# EAGLE board Simple_BRD (EAGLE 9.6.2)
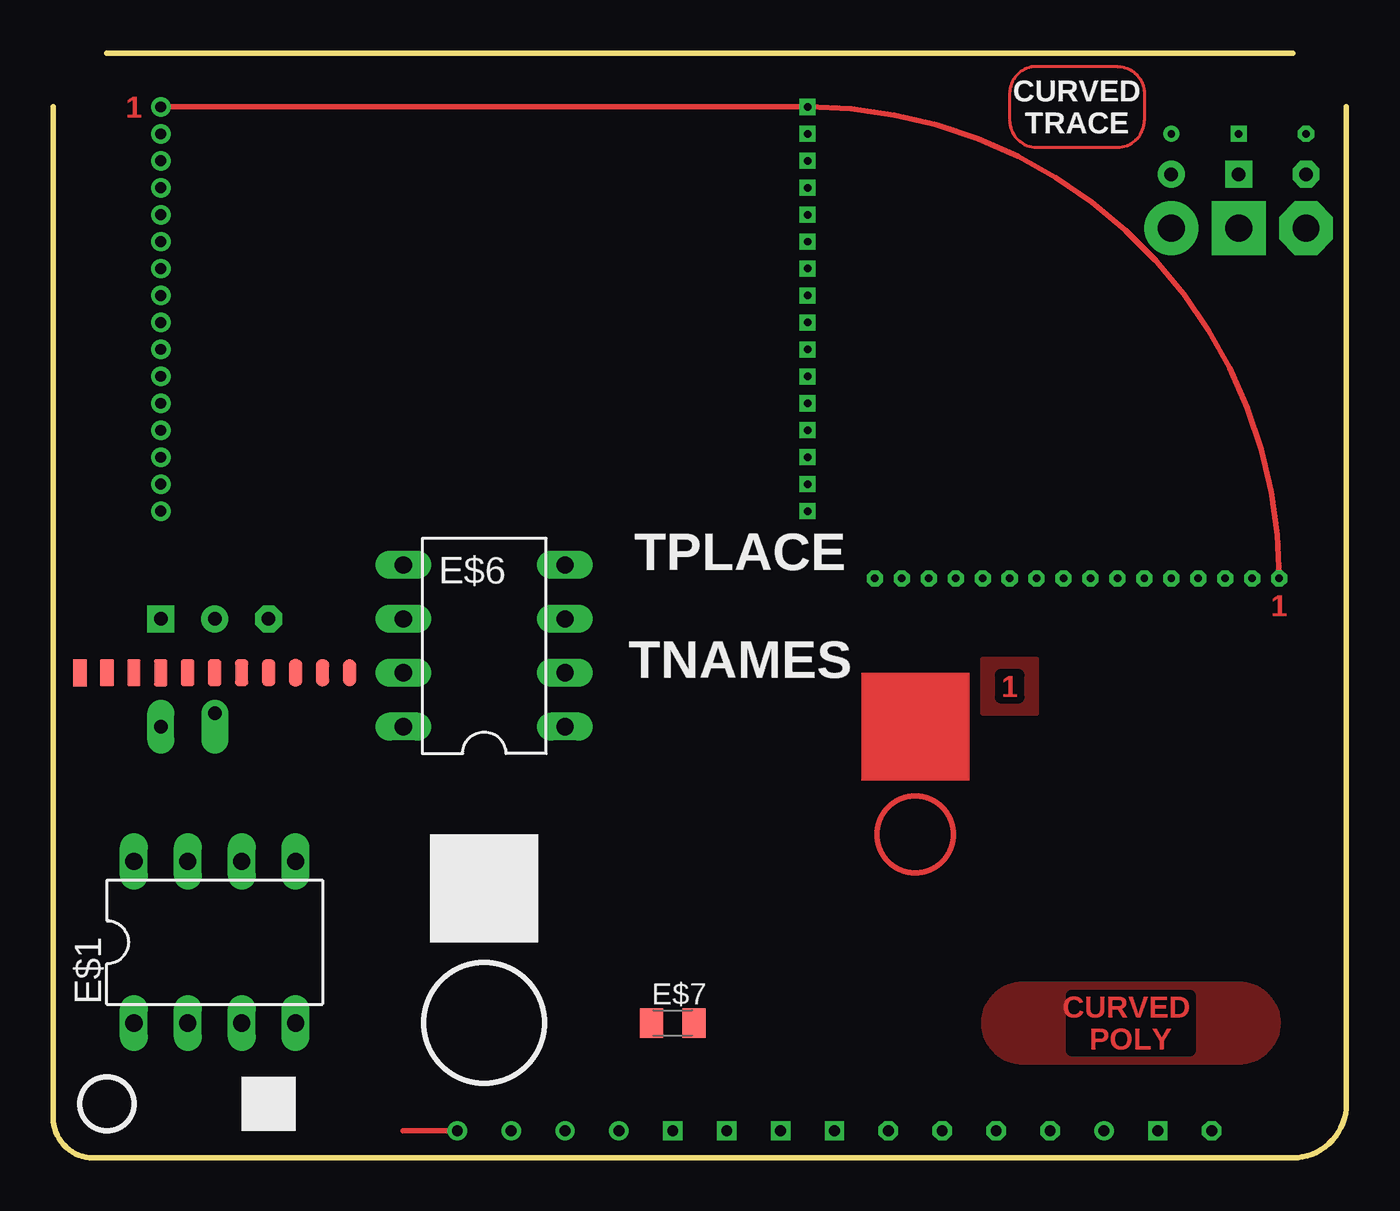
[diagram p0: board, top side]
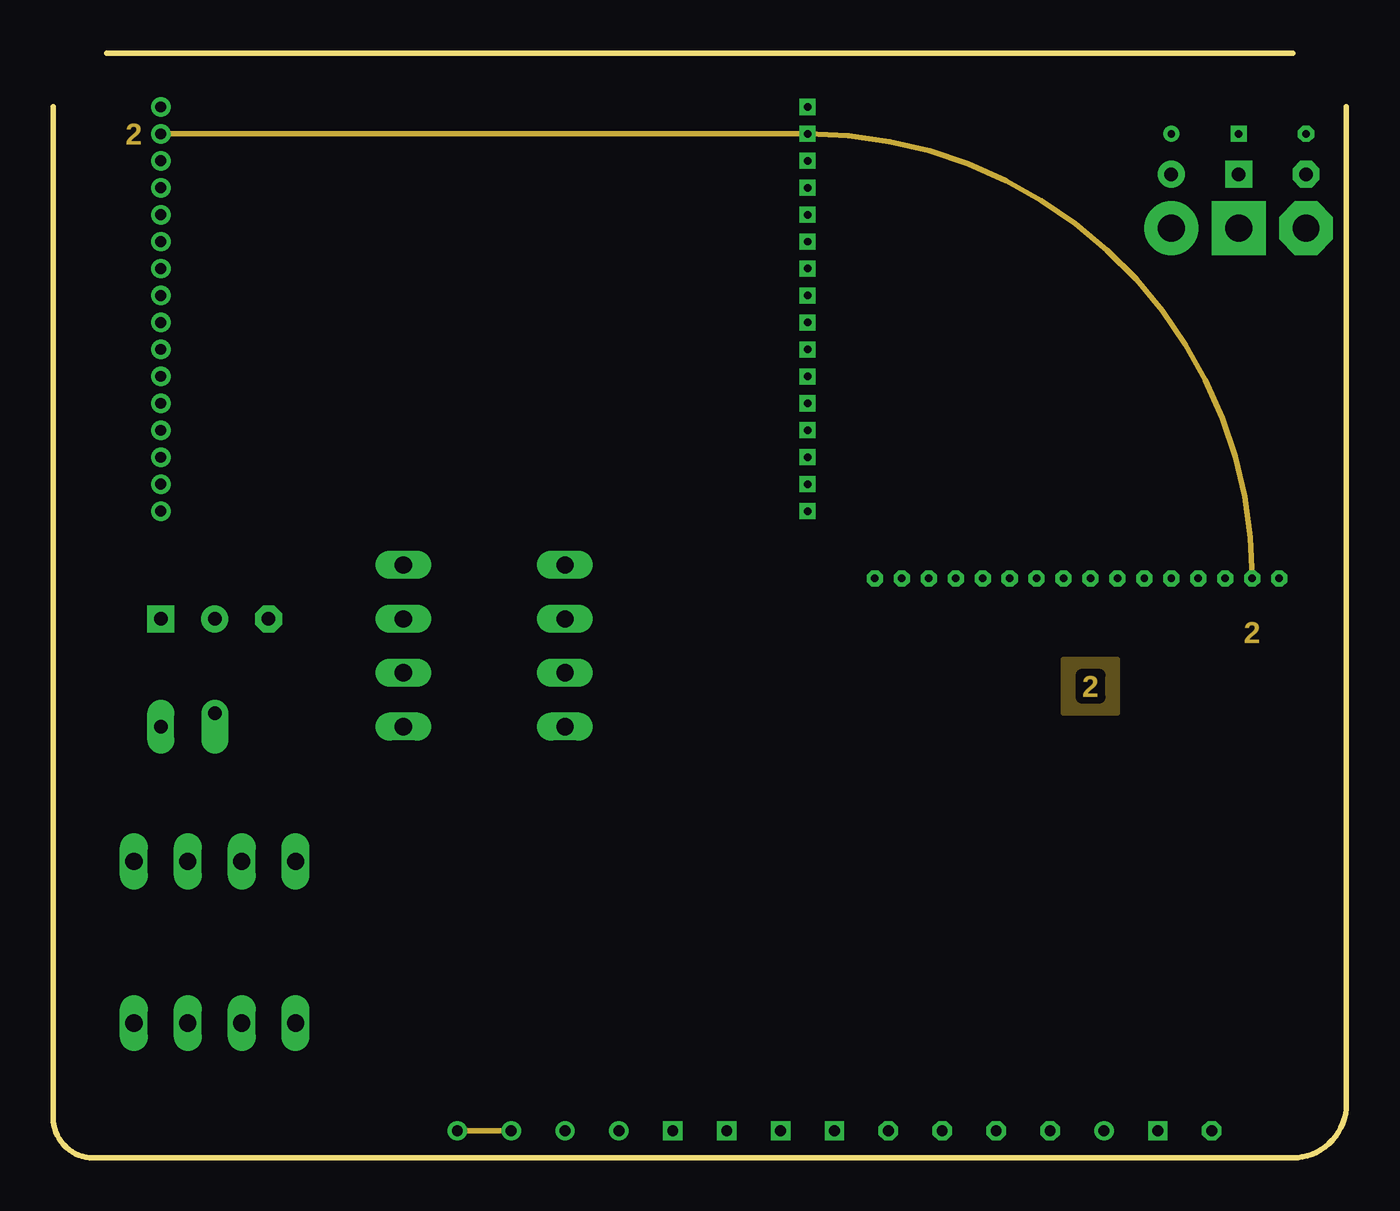
[diagram p1: board, inner layer Route2]
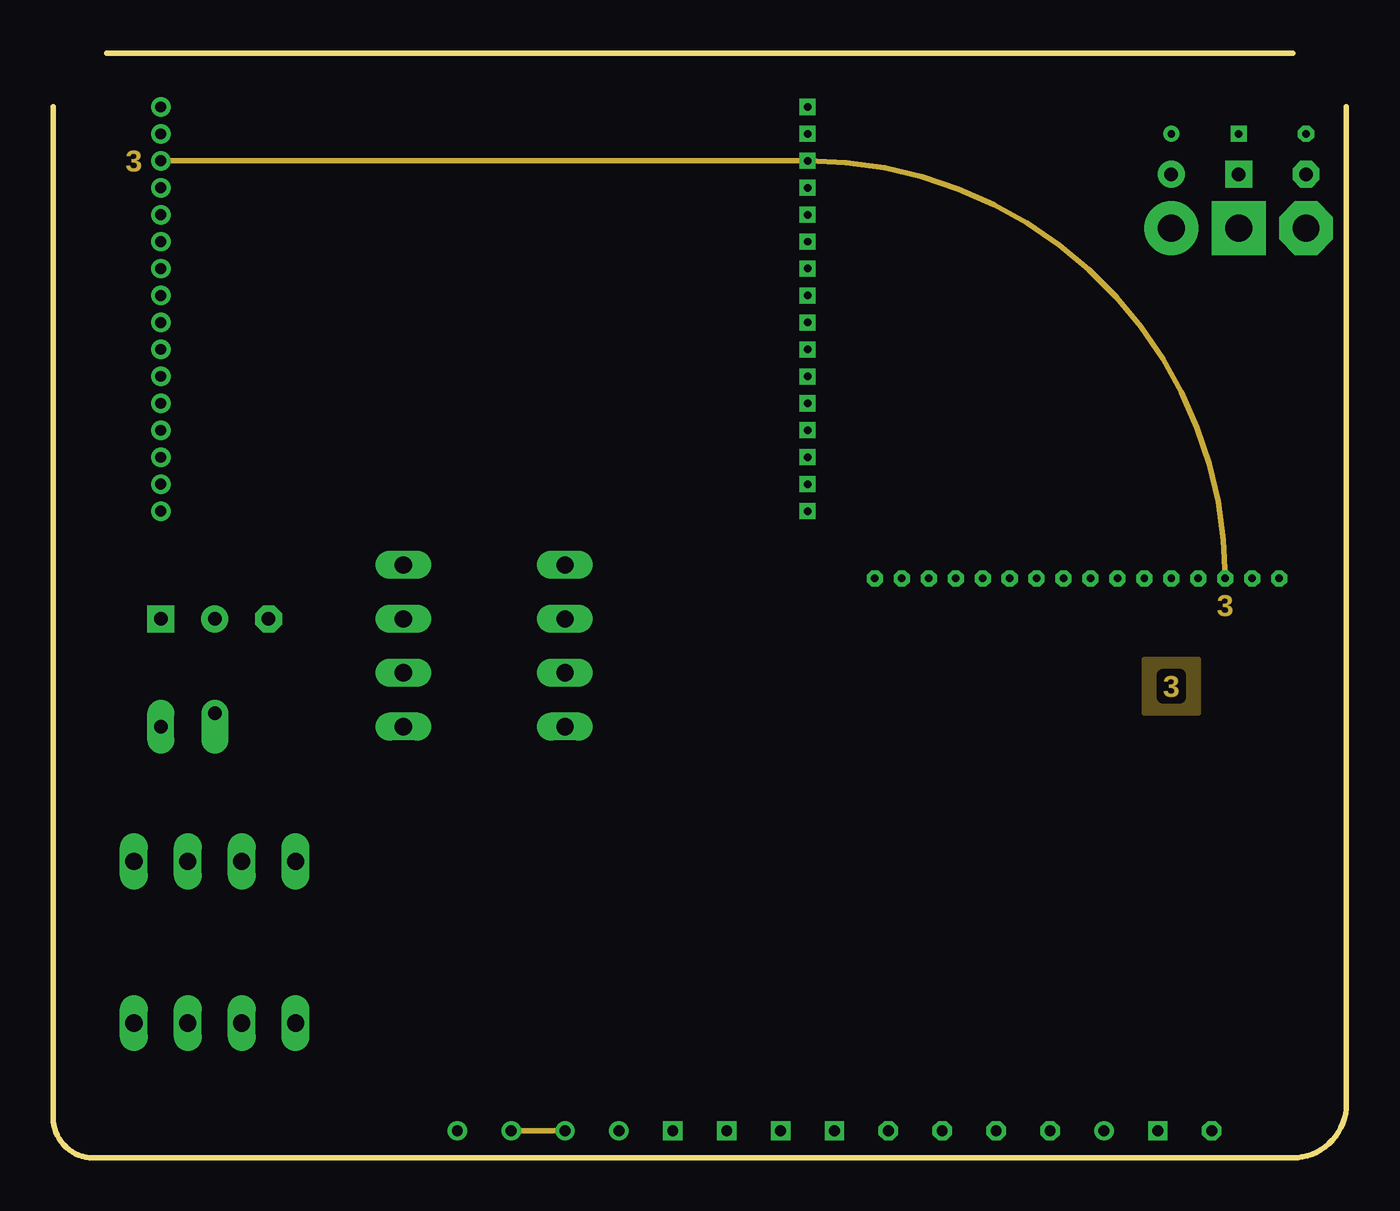
[diagram p2: board, inner layer Route3]
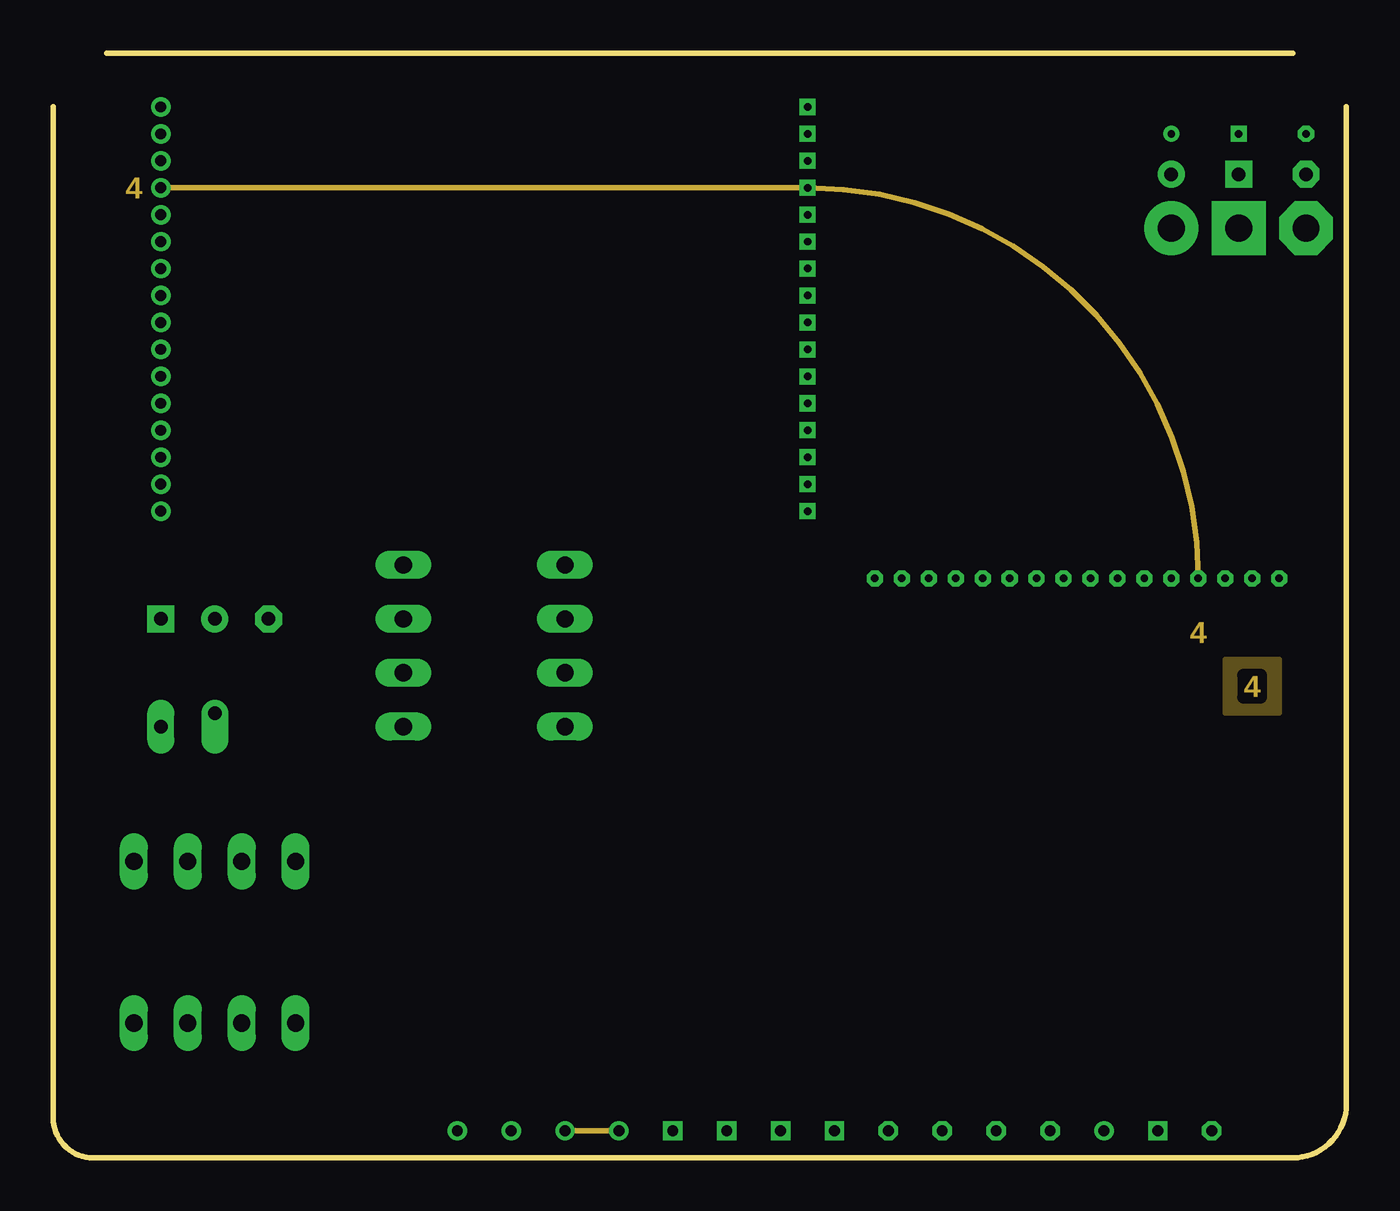
[diagram p3: board, inner layer Route4]
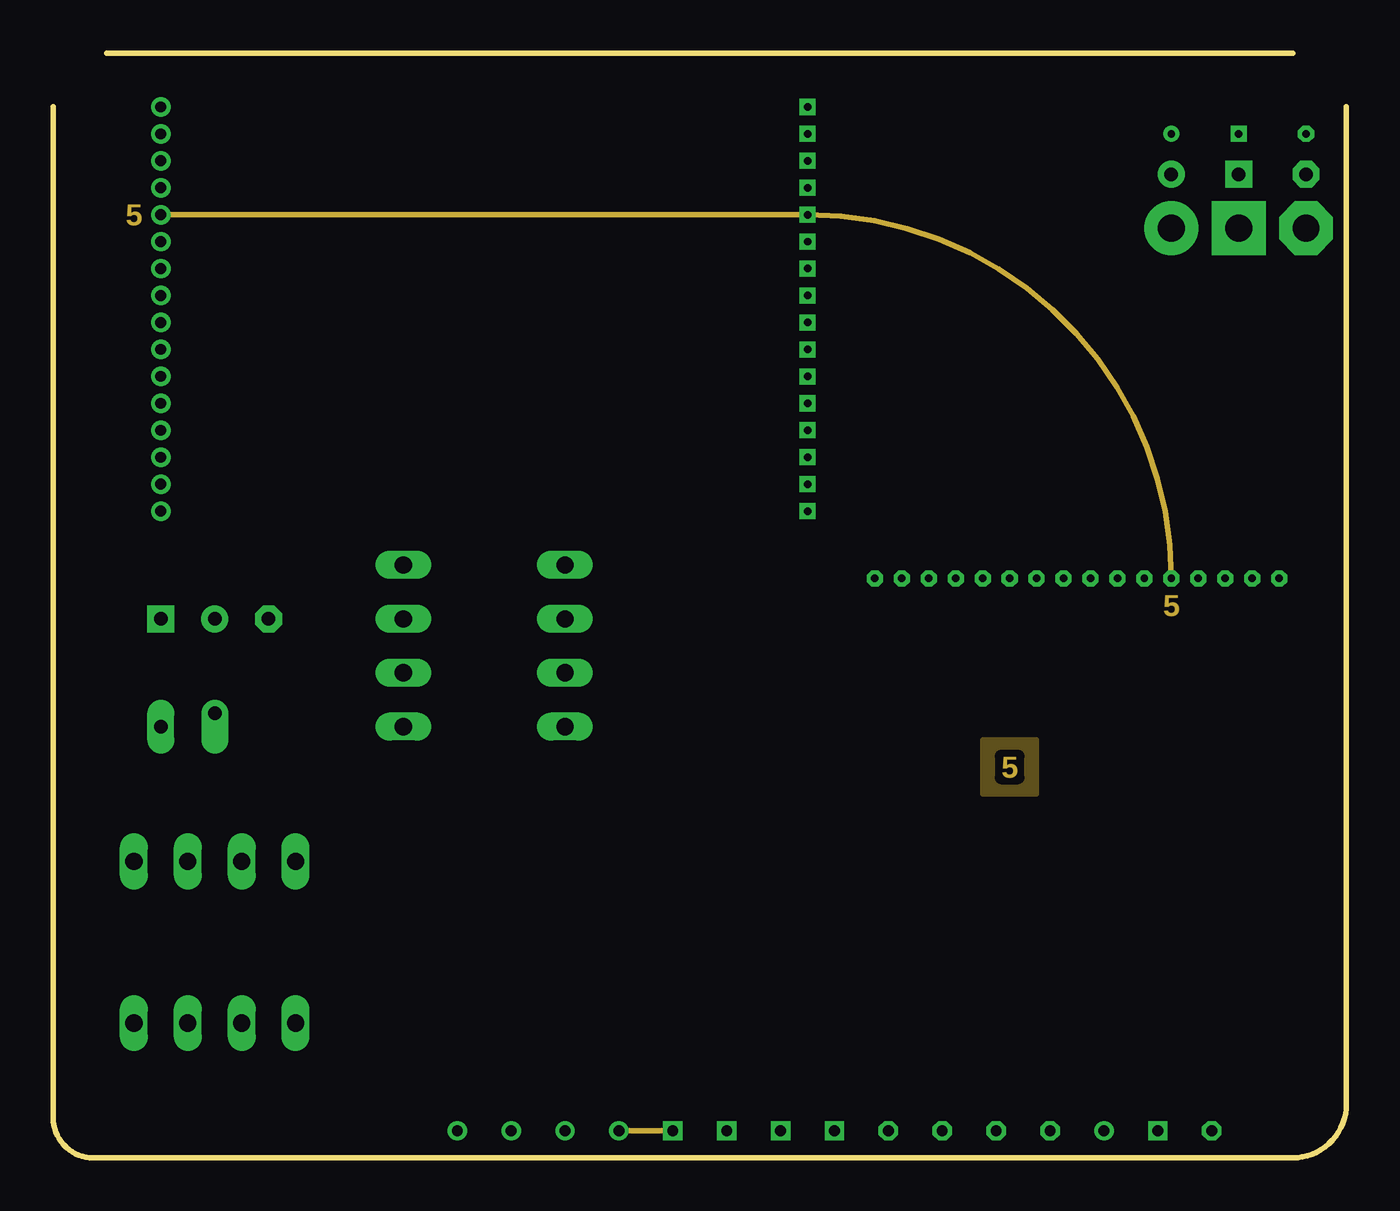
[diagram p4: board, inner layer Route5]
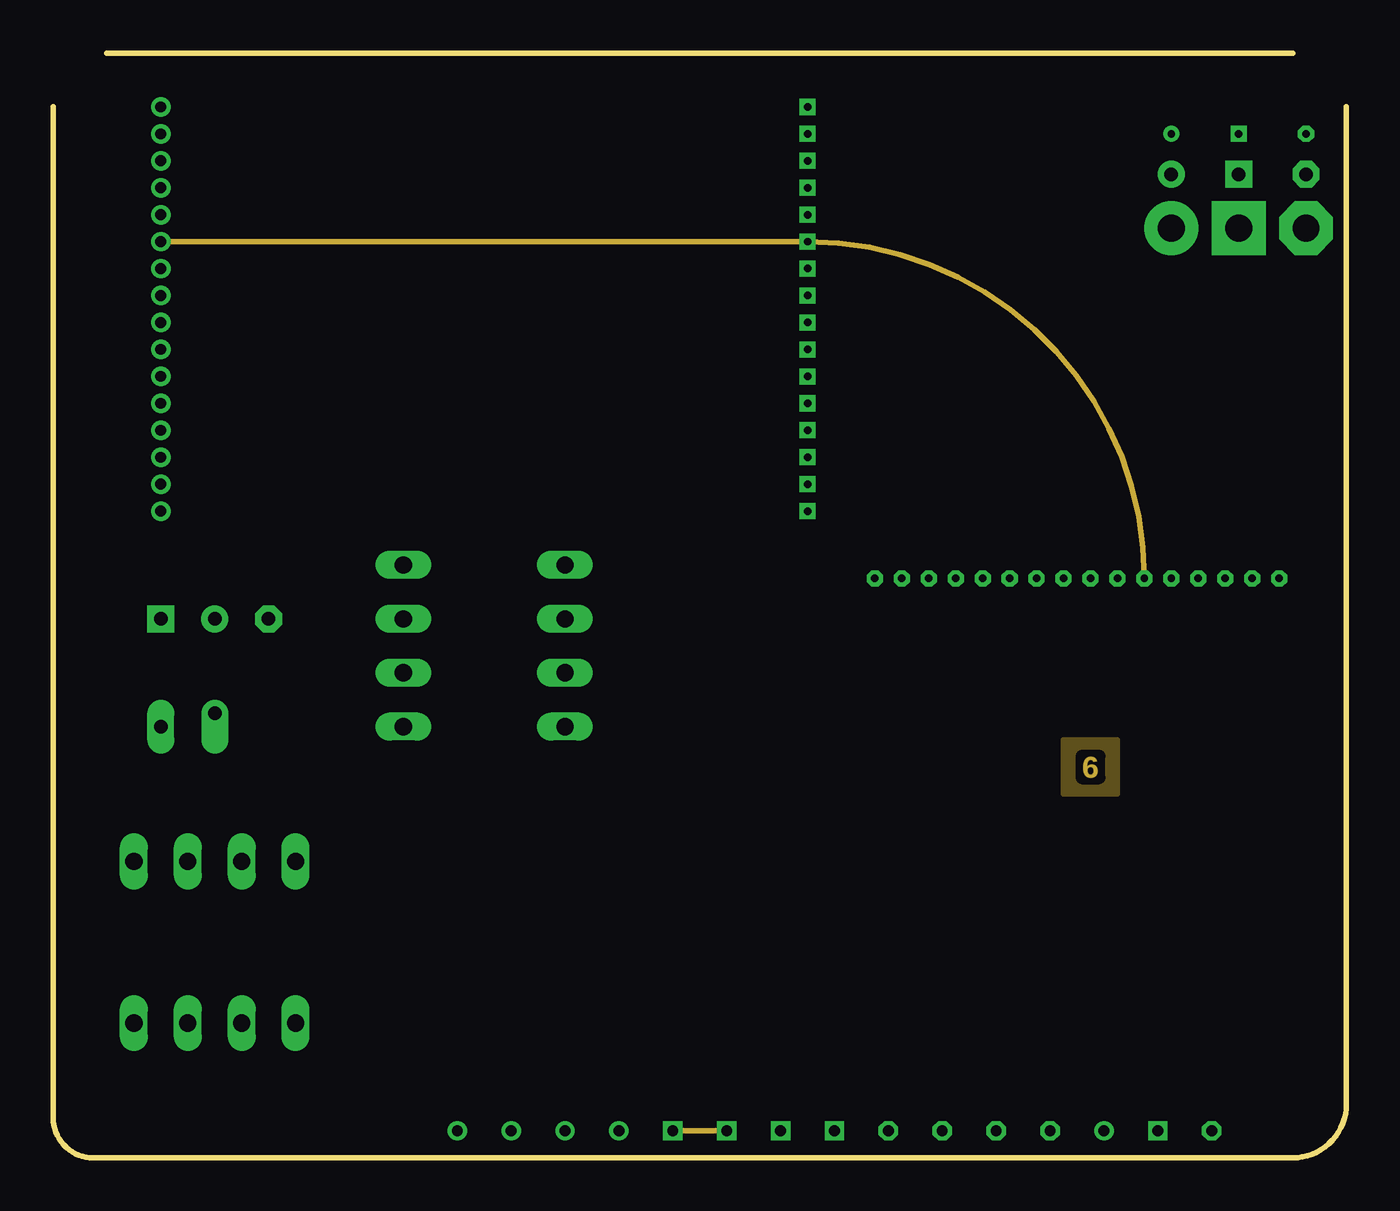
[diagram p5: board, inner layer Route6]
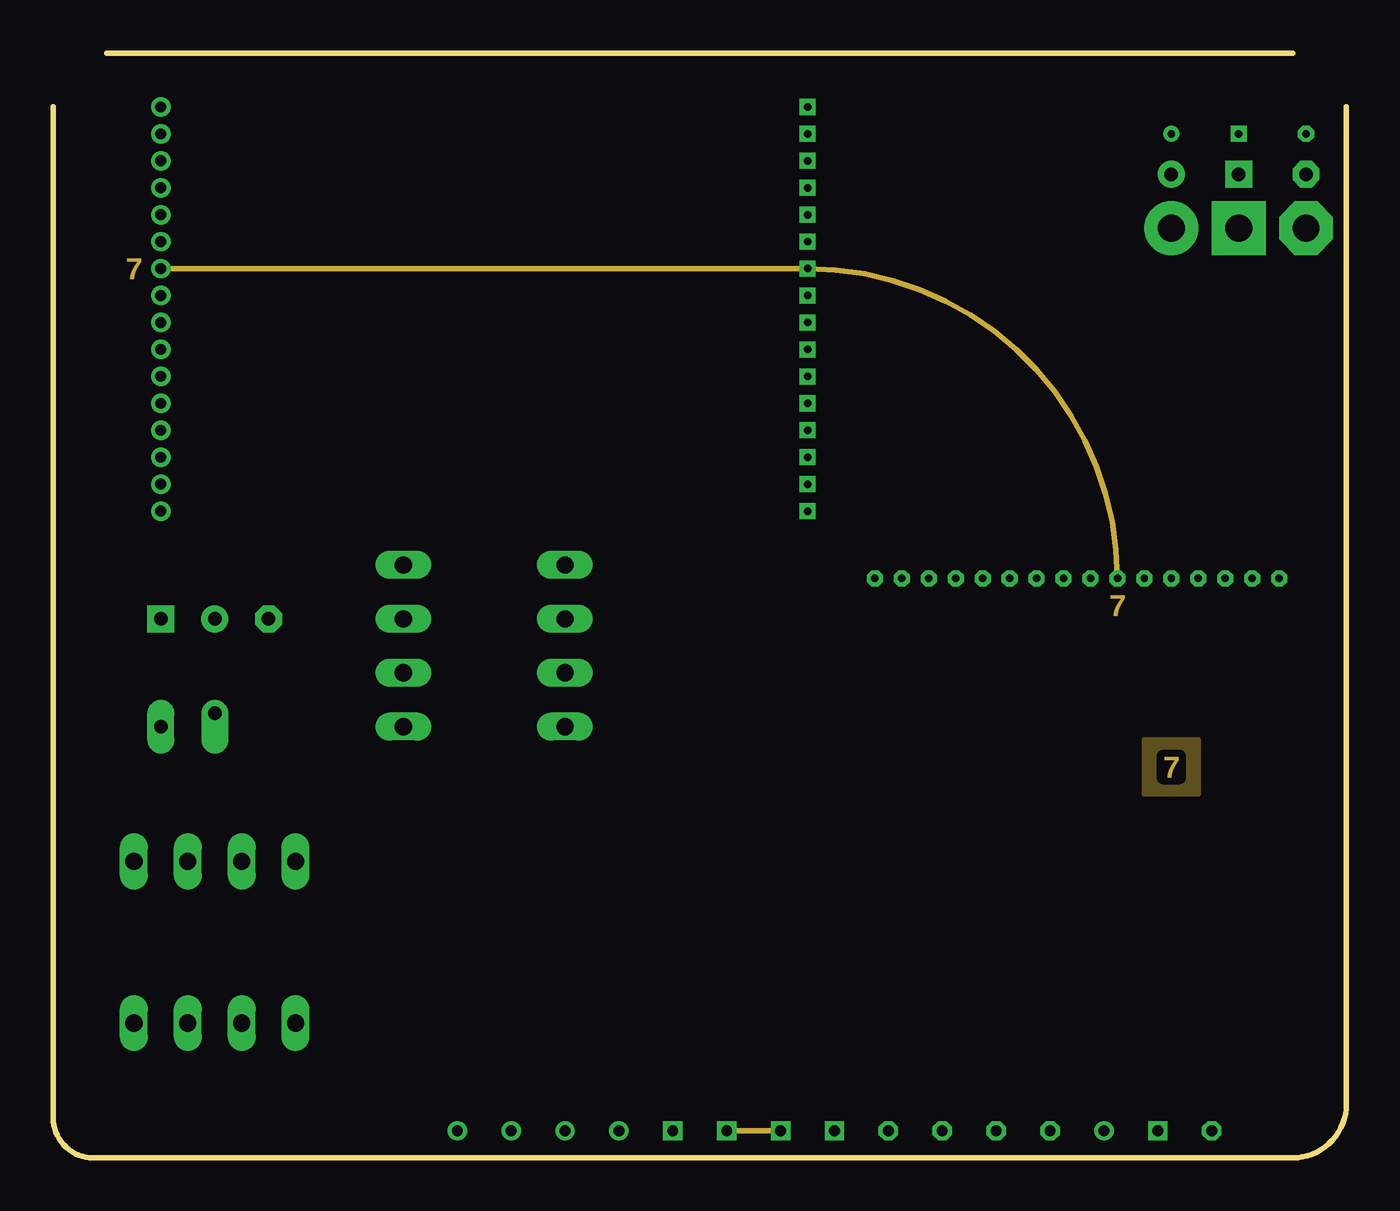
[diagram p6: board, inner layer Route7]
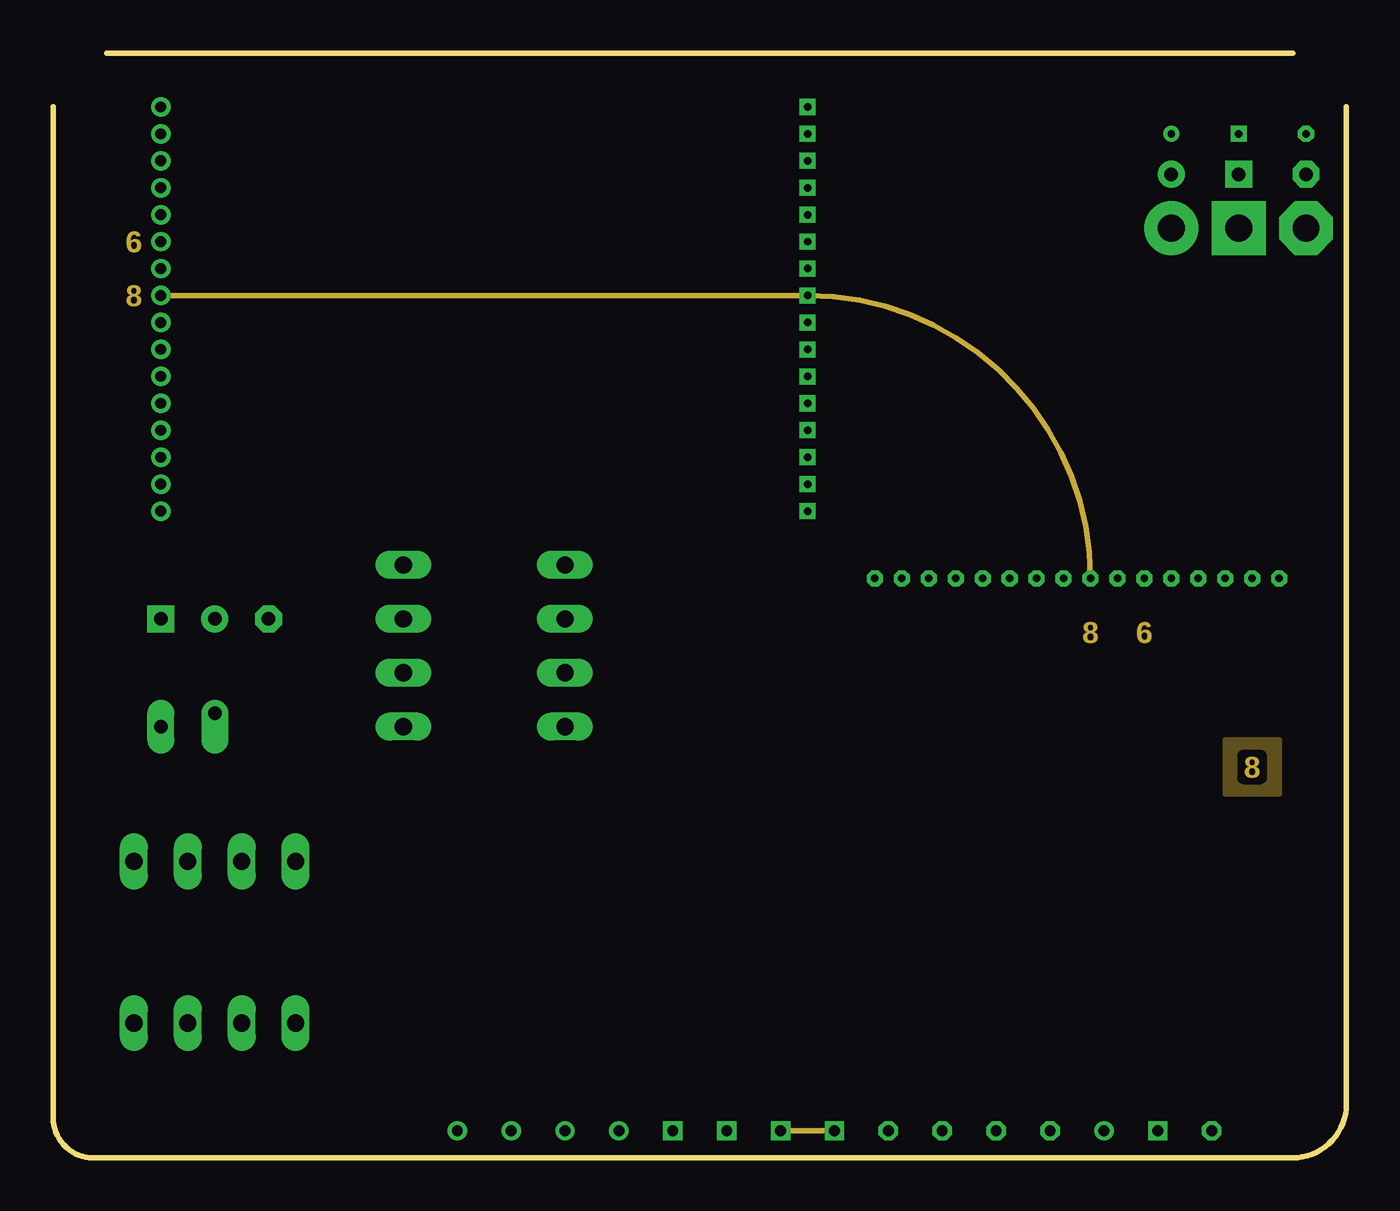
[diagram p7: board, inner layer Route8]
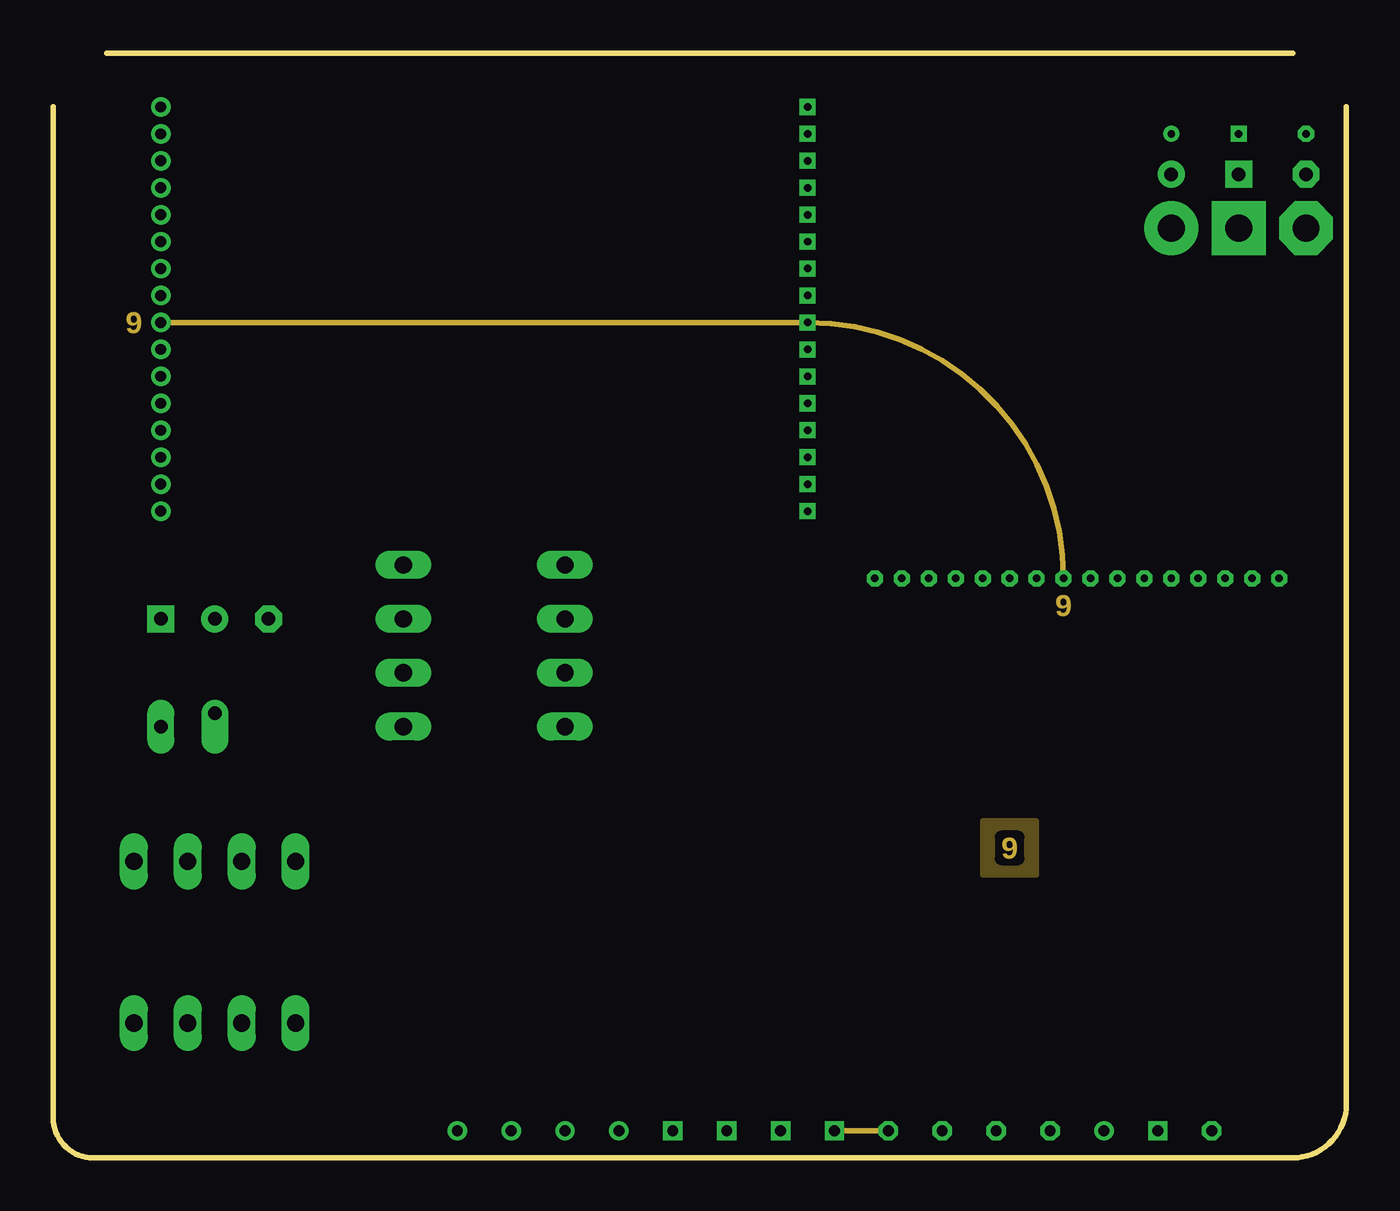
[diagram p8: board, inner layer Route9]
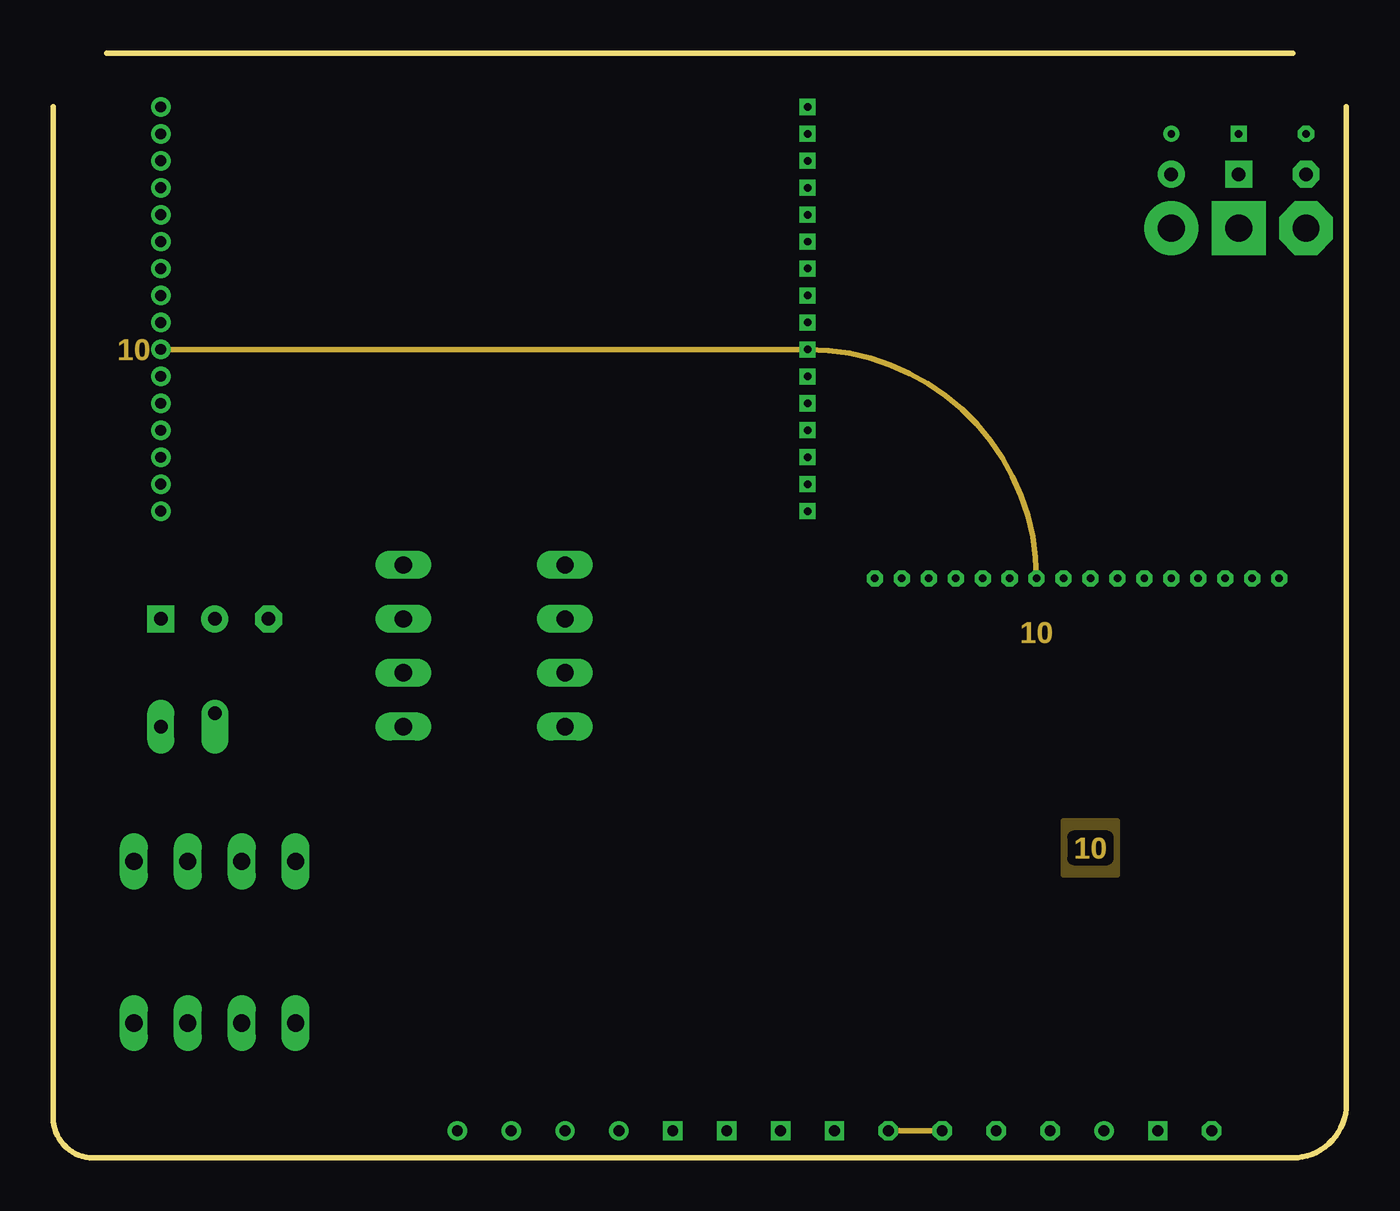
[diagram p9: board, inner layer Route10]
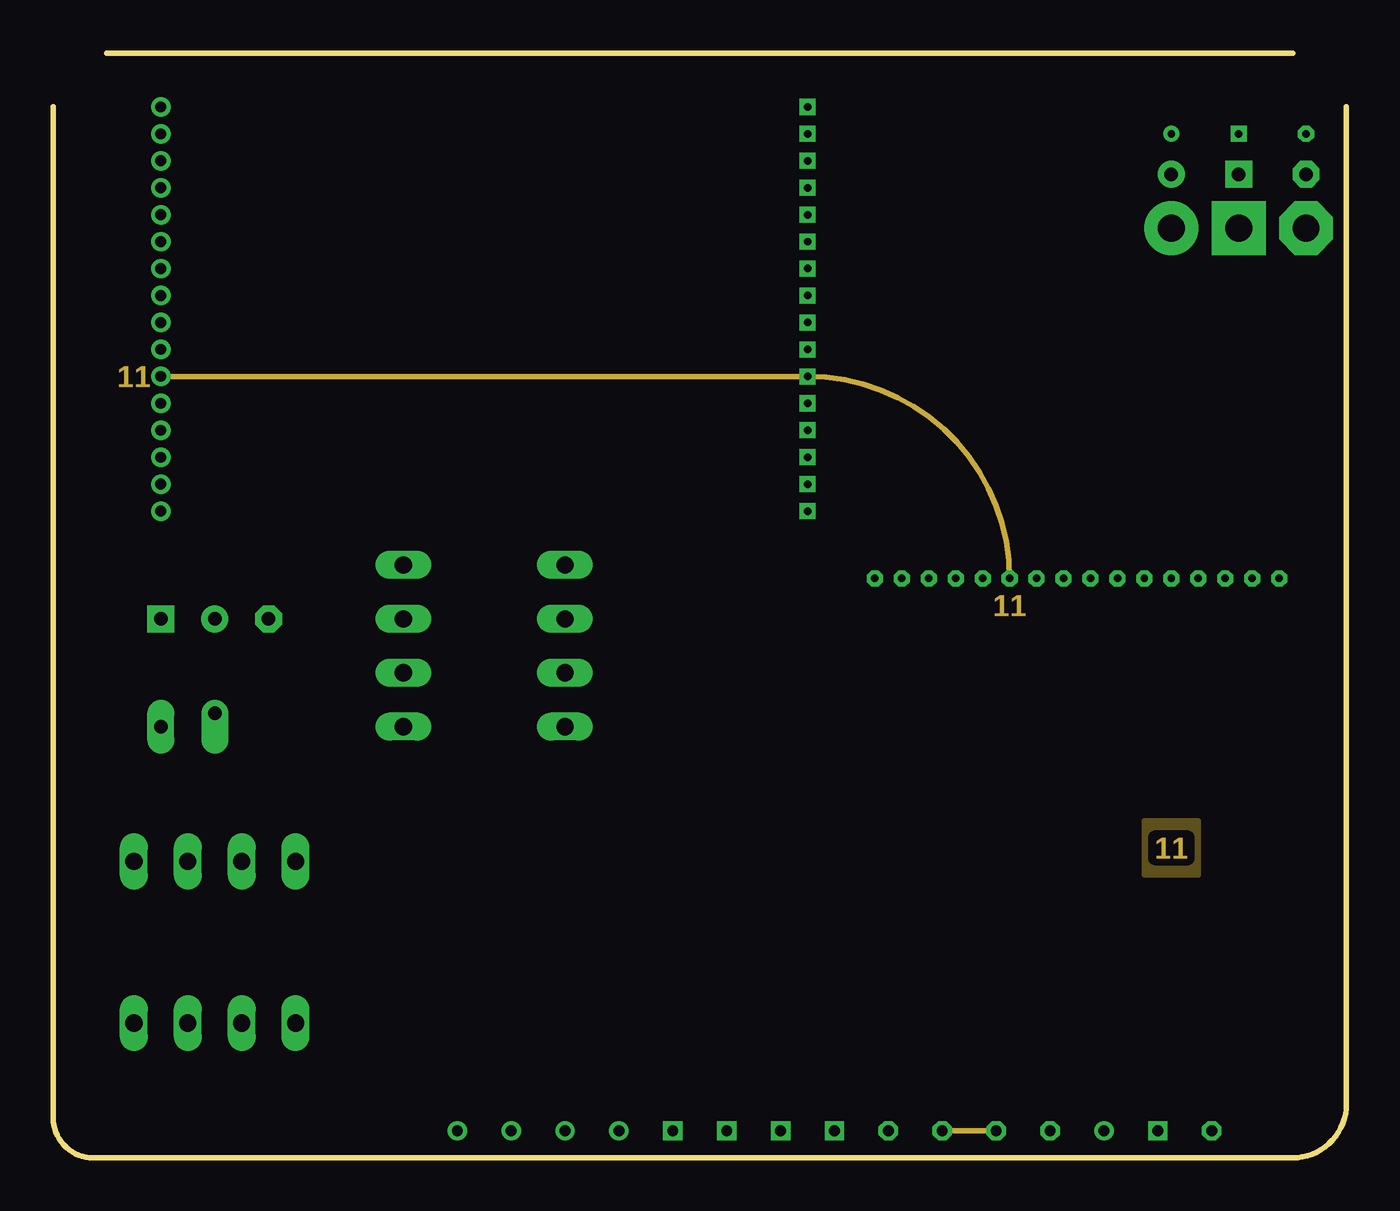
[diagram p10: board, inner layer Route11]
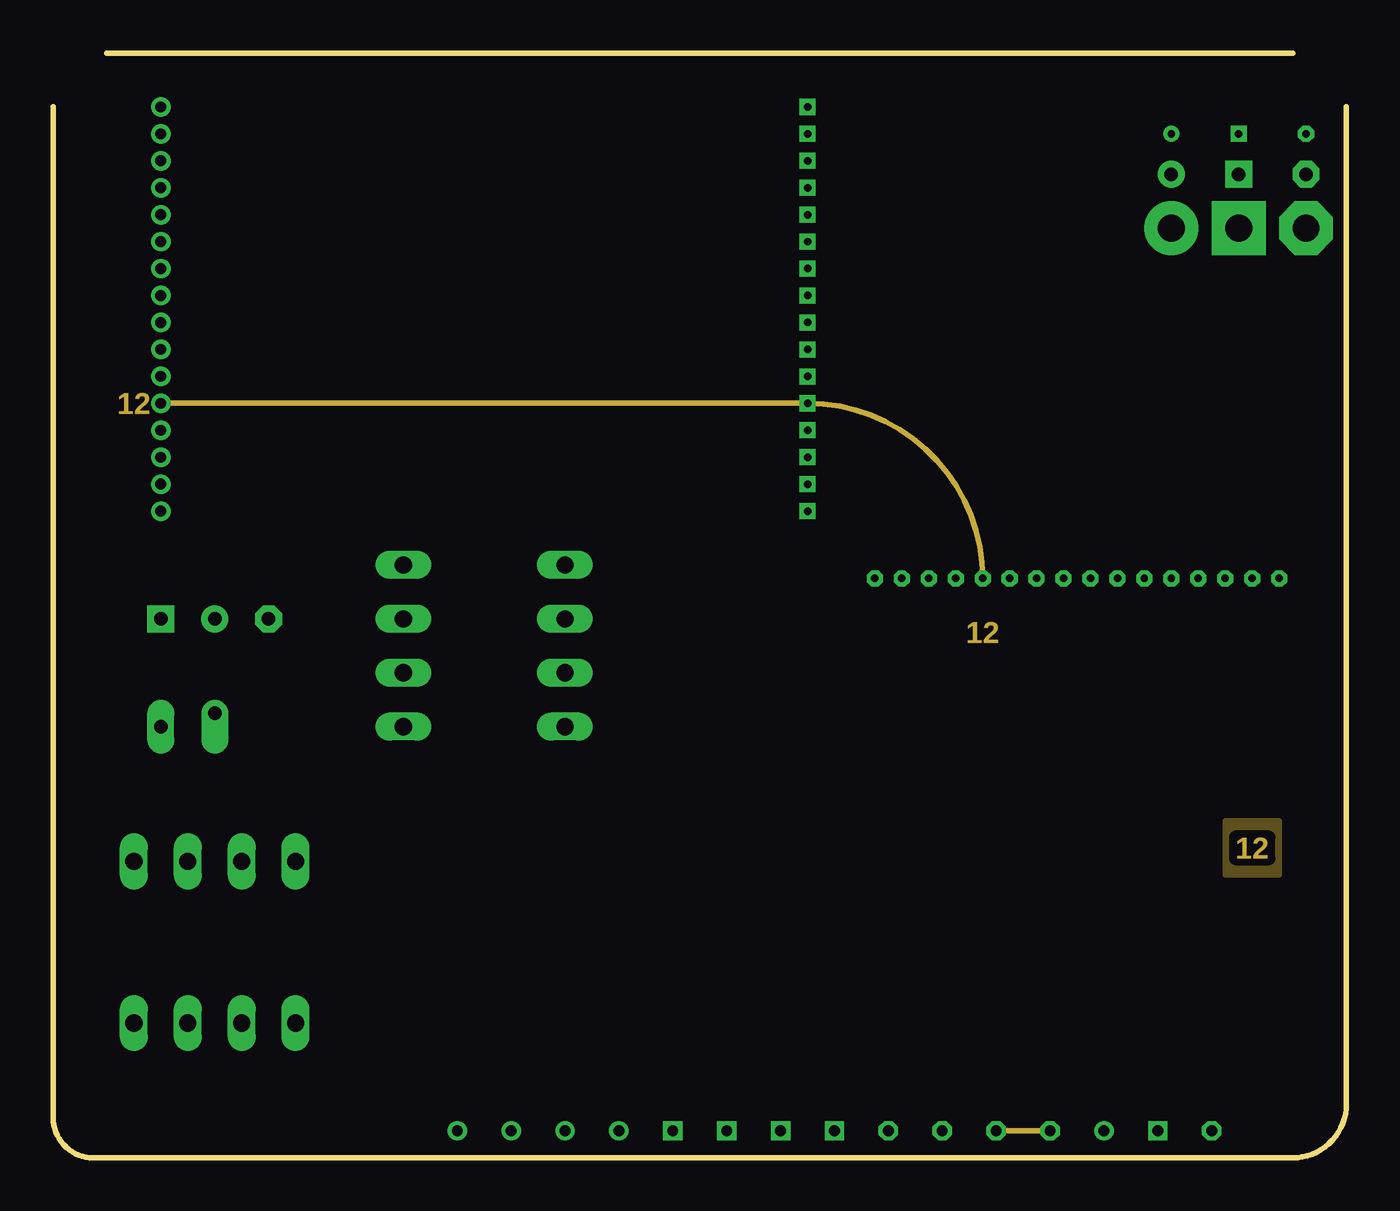
[diagram p11: board, inner layer Route12]
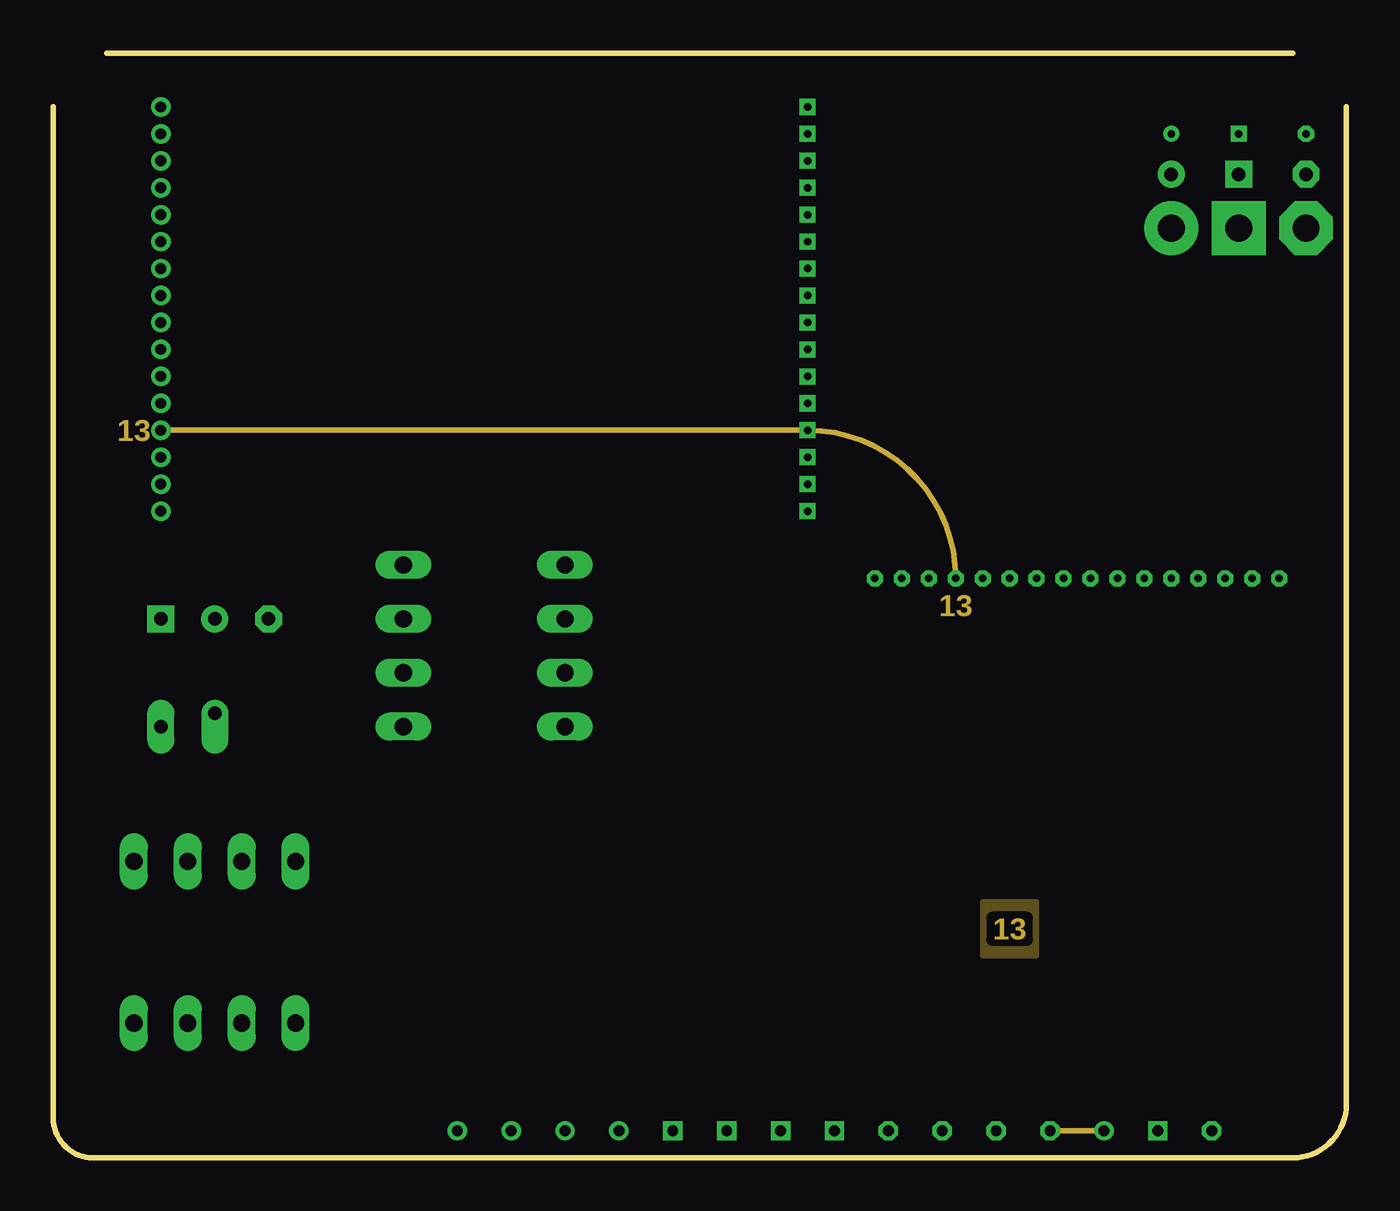
[diagram p12: board, inner layer Route13]
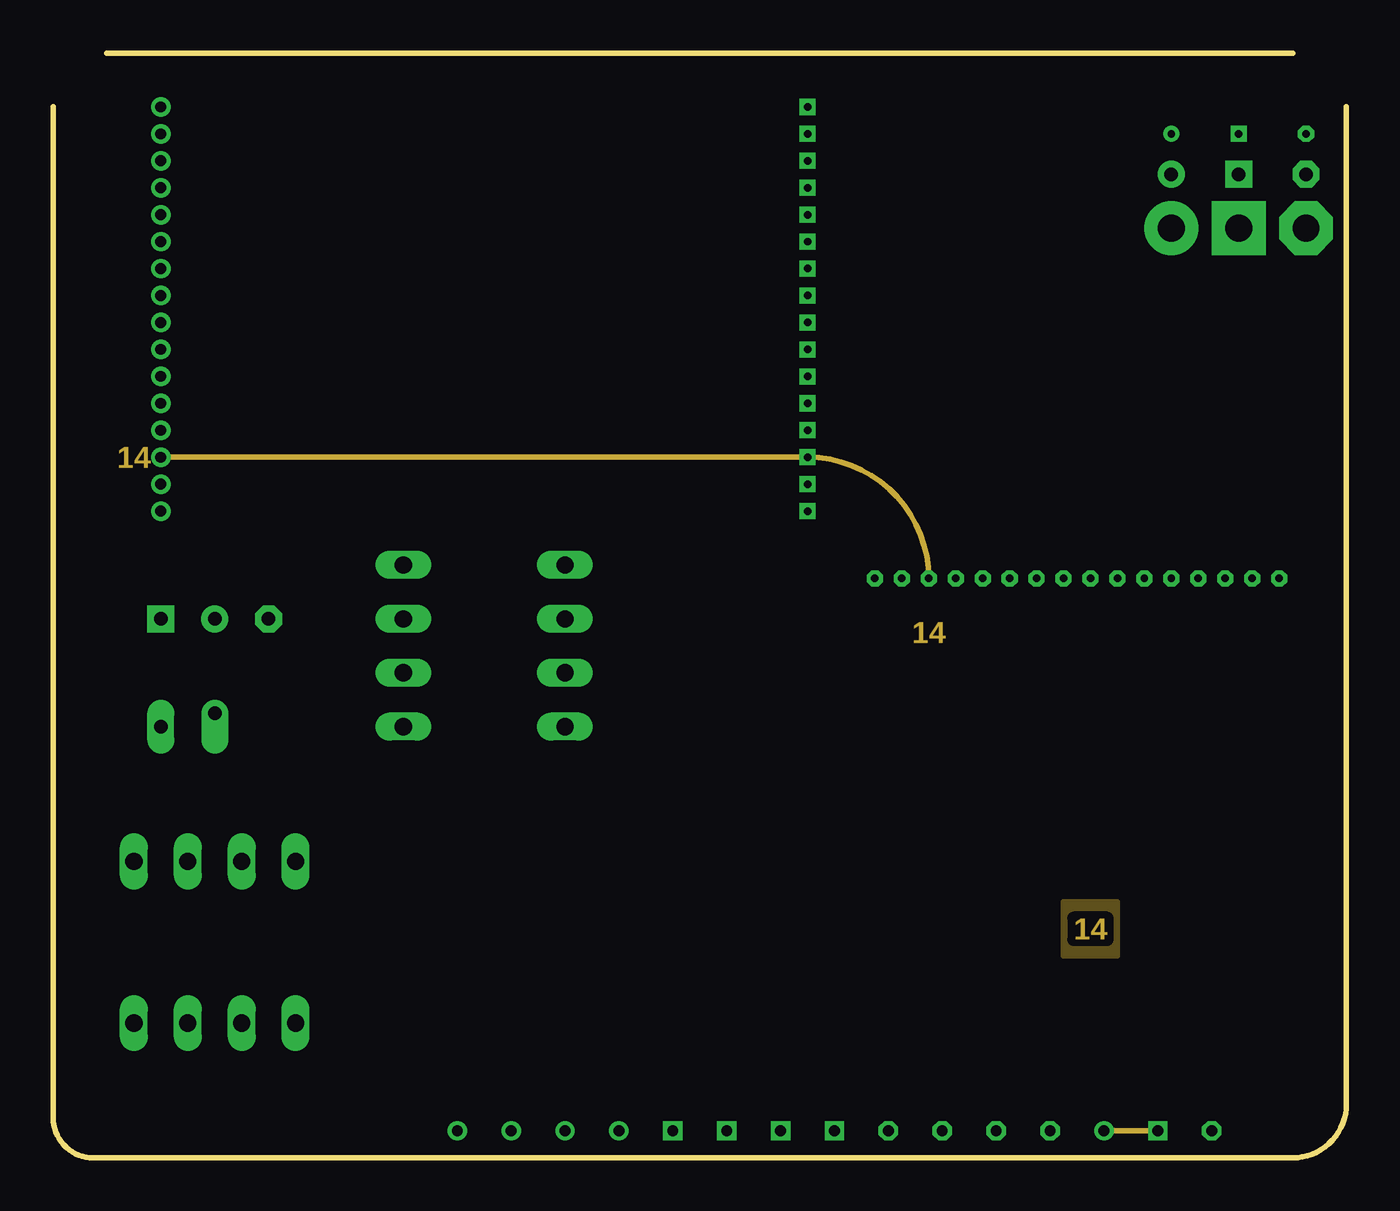
[diagram p13: board, inner layer Route14]
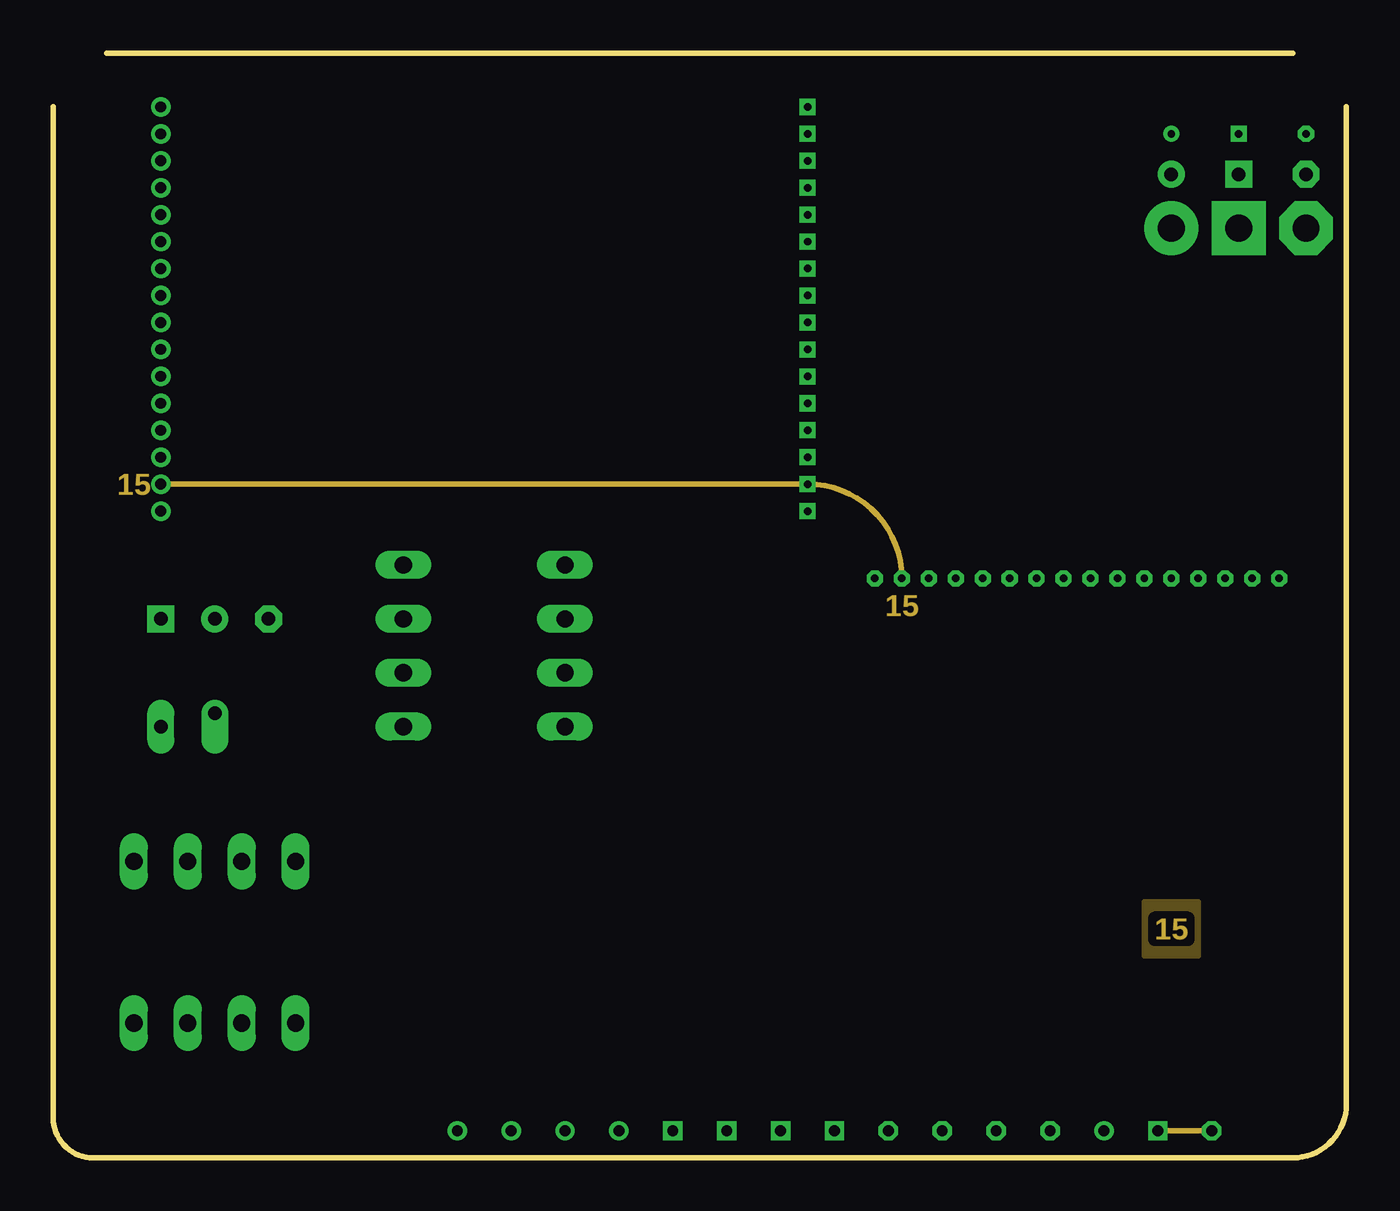
[diagram p14: board, inner layer Route15]
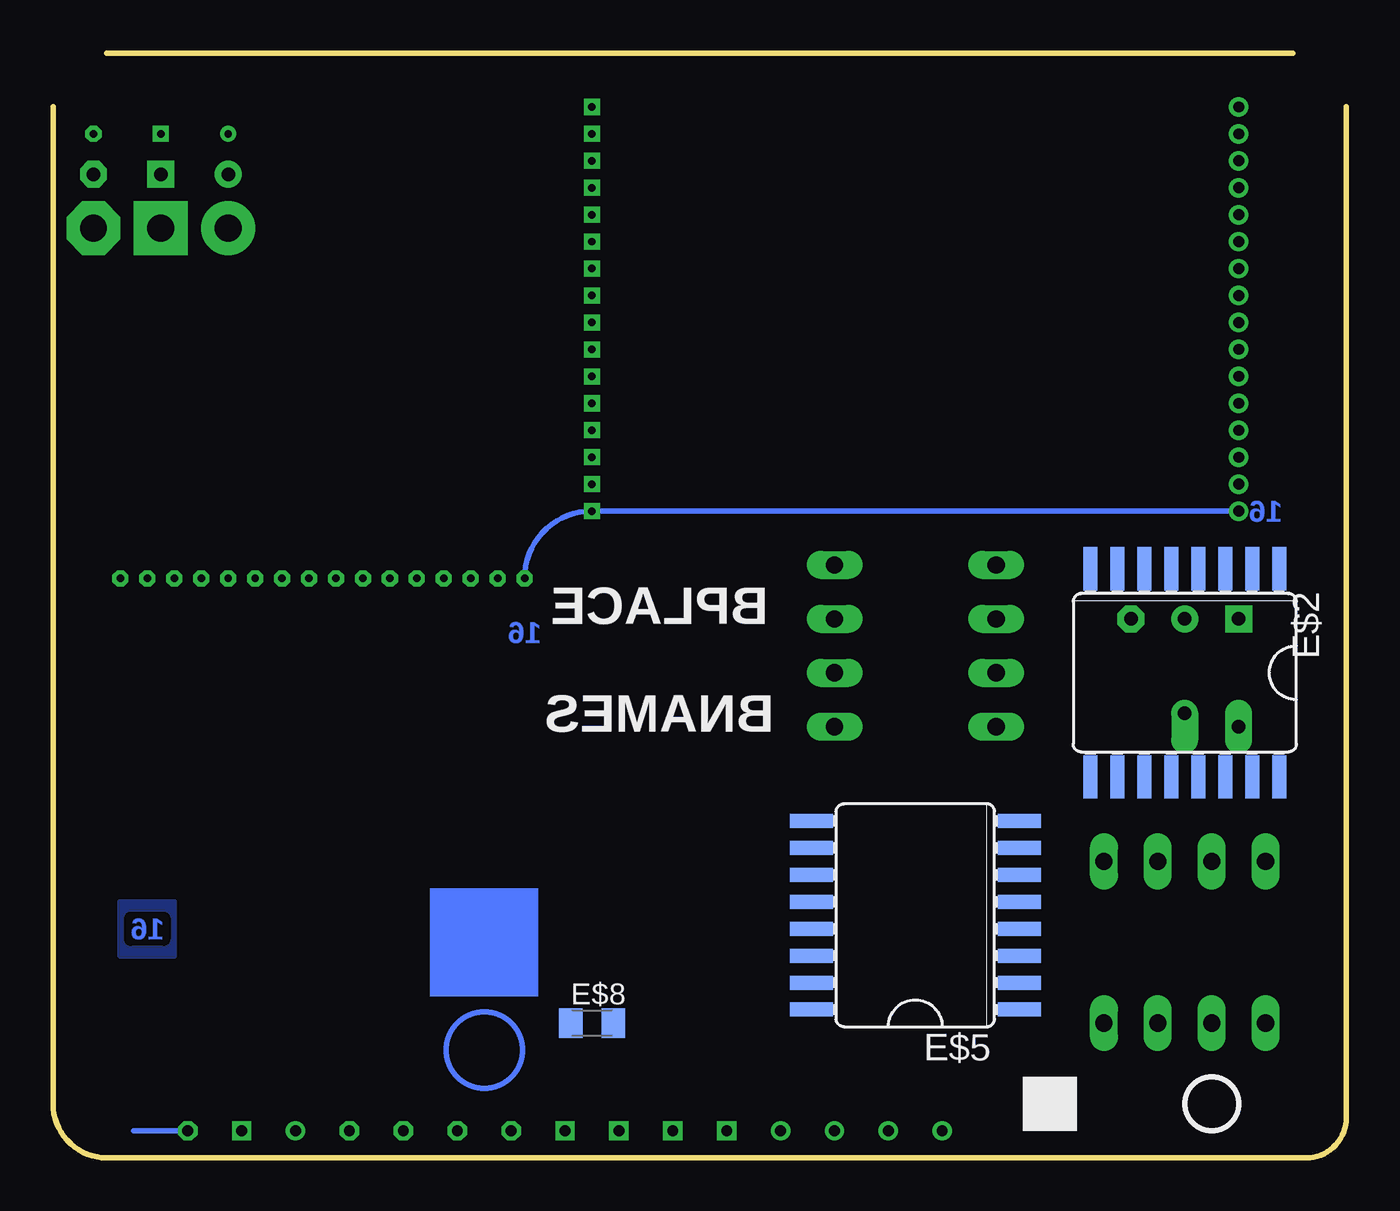
[diagram p15: board, bottom side, seen from below]

Size 60.96 x 52.07 mm. Coordinates in mm from the lower left corner, seen from the top.
Outline: 0,49.53 0,1.91 arc90 1.91,0 58.42,0 arc90 60.96,2.54 60.96,49.53
Outline: 2.54,52.07 58.42,52.07
Copper layers (1+2*3+4*5+6*7+8*9+10*11+12*13+14*15+16): Top 0.035mm / dielectric 1.5mm / Route2 0.035mm / dielectric 0.15mm / Route3 0.035mm / dielectric 0.2mm / Route4 0.035mm / dielectric 0.15mm / Route5 0.035mm / dielectric 0.2mm / Route6 0.035mm / dielectric 0.15mm / Route7 0.035mm / dielectric 0.2mm / Route8 0.035mm / dielectric 0.15mm / Route9 0.035mm / dielectric 0.2mm / Route10 0.035mm / dielectric 0.15mm / Route11 0.035mm / dielectric 0.2mm / Route12 0.035mm / dielectric 0.15mm / Route13 0.035mm / dielectric 0.2mm / Route14 0.035mm / dielectric 0.15mm / Route15 0.035mm / dielectric 0.2mm / Bottom 0.035mm
Design rules "default *": minimum track width 6mil, minimum drill 0.35mm, track to track 6mil, track to pad 6mil, pad to pad 6mil, via to via 6mil, smd to smd 6mil, copper to edge 40mil, drill to drill 6mil, minimum pad ring 10mil, minimum via ring 8mil, stop-mask expansion 4mil, vias tented up to drill 0mil, thermal gap 10mil

## Footprints (pad centres in the part's own frame; a part is rotated, then mirrored left to right if it is on the bottom)
DIL08 = drill 0.813 long: 1 -3.81,-3.81; 2 -1.27,-3.81; 3 1.27,-3.81; 4 3.81,-3.81; 5 3.81,3.81; 6 1.27,3.81; 7 -1.27,3.81; 8 -3.81,3.81
SO16L = smd 0.66 x 2.032: 1 -4.445,-4.902; 2 -3.175,-4.902; 3 -1.905,-4.902; 4 -0.635,-4.902; 5 0.635,-4.902; 6 1.905,-4.902; 7 3.175,-4.902; 8 4.445,-4.902; 9 4.445,4.902; 10 3.175,4.902; 11 1.905,4.902; 12 0.635,4.902; 13 -0.635,4.902; 14 -1.905,4.902; 15 -3.175,4.902; 16 -4.445,4.902
TEST = drill 0.635 pad 1.27 square: P$1 0,0 | drill 0.635 pad 1.27: P$2 2.54,0 | drill 0.635 pad 1.27 octagon: P$3 5.08,0 | drill 0.635 pad 1.27 long: P$4 0,-5.08 | drill 0.635 pad 1.27 offset: P$5 2.54,-4.445
TEST2 = smd 0.635 x 1.27: P$6 6.35,0; P$7 5.08,0; P$8 3.81,0; P$9 2.54,0; P$10 1.27,0; P$11 -1.27,0; P$12 -2.54,0; P$13 -3.81,0; P$14 -5.08,0; P$15 -6.35,0; P$16 0,0
C0805K = smd 1.1 x 1.4: 1 -1,0; 2 1,0

## Placement (x,y rotation side)
E$1  [DIL08]  7.62,10.16 0 top
E$2  [SO16L]  7.62,22.86 180 bottom
E$3  [TEST]  5.08,25.4 0 top
E$4  [TEST2]  7.62,22.86 0 top
E$5  [SO16L]  20.32,11.43 90 bottom
E$6  [DIL08]  20.32,24.13 90 top
E$7  1uF  [C0805K]  29.21,6.35 0 top
E$8  1uF  [C0805K]  35.56,6.35 0 bottom

## Library data of the parts
E$1 E$2 E$5 E$6 = 74xx-us
E$3 E$4 = untitled
E$7 E$8 = adafruit

## Tracks (layer width: path | path; a pad name or v marks a point on that pad's centre or on a via)
S$1  (via drill 0.35, 0.51)
  Top 0.254: v5.08,49.53 v35.56,49.53 arc-90 v57.78,27.3
S$2  (via drill 0.35, 0.51)
  Route2 0.254: v5.08,48.26 v35.56,48.26 arc-90 v56.52,27.3
S$3  (via drill 0.35)
  other vias: 52.7,48.26
S$4  (via drill 0.35, 0.51)
  Route3 0.254: v5.08,46.99 v35.56,46.99 arc-90 v55.24,27.3
S$5  (via drill 0.35, 0.51)
  Route4 0.254: v5.08,45.72 v35.56,45.72 arc-90 v53.98,27.3
S$6  (via drill 0.35, 0.51)
  Route5 0.254: v5.08,44.45 v35.56,44.45 arc-90 v52.7,27.3
S$7  (via drill 0.35, 0.51)
  Route6 0.254: v5.08,43.18 v35.56,43.18 arc-90 v51.44,27.3
S$8  (via drill 0.35, 0.51)
  Route7 0.254: v5.08,41.91 v35.56,41.91 arc-90 v50.16,27.3
S$9  (via drill 0.35, 0.51)
  Route8 0.254: v5.08,40.64 v35.56,40.64 arc-90 v48.9,27.3
S$10  (via drill 0.35, 0.51)
  Route9 0.254: v5.08,39.37 v35.56,39.37 arc-90 v47.62,27.3
S$11  (via drill 0.35, 0.51)
  Route10 0.254: v5.08,38.1 v35.56,38.1 arc-90 v46.35,27.3
S$12  (via drill 0.35, 0.51)
  Route12 0.254: v5.08,35.56 v35.56,35.56 arc-90 v43.81,27.3
S$13  (via drill 0.35, 0.51)
  Route11 0.254: v5.08,36.83 v35.56,36.83 arc-90 v45.09,27.3
S$14  (via drill 0.35, 0.51)
  Route13 0.254: v5.08,34.29 v35.56,34.29 arc-90 v42.55,27.3
S$15  (via drill 0.35, 0.51)
  Route14 0.254: v5.08,33.02 v35.56,33.02 arc-90 v41.27,27.3
S$16  (via drill 0.35, 0.51)
  Route15 0.254: v5.08,31.75 v35.56,31.75 arc-90 v40.01,27.3
S$17  (via drill 0.35, 0.51)
  Bottom 0.254: v5.08,30.48 v35.56,30.48 arc-90 v38.73,27.3
S$18  (via drill 0.35)
  other vias: 55.88,48.26
S$19  (via drill 0.35)
  other vias: 59.05,48.26
S$20  (via drill 0.64 pad 1.27)
  other vias: 52.7,46.35
S$21
  Top 0.152: 50.16,51.44 46.35,51.44 arc90 45.09,50.16 45.09,48.9 arc90 46.35,47.62 50.16,47.62 arc90 51.44,48.9 51.44,50.16 arc90 50.16,51.44
S$22  (via drill 0.64 pad 1.27)
  other vias: 55.88,46.35
S$23  (via drill 0.64 pad 1.27)
  other vias: 59.05,46.35
S$24  (via drill 0.51)
  Top 0.254: 16.51,1.27 v19.05,1.27
  Route2 0.254: v19.05,1.27 v21.59,1.27
  Route3 0.254: v21.59,1.27 v24.13,1.27
  Route4 0.254: v24.13,1.27 v26.67,1.27
  Route5 0.254: v26.67,1.27 v29.21,1.27
  Route6 0.254: v29.21,1.27 v31.75,1.27
  Route7 0.254: v31.75,1.27 v34.29,1.27
  Route8 0.254: v34.29,1.27 v36.83,1.27
  Route9 0.254: v36.83,1.27 v39.37,1.27
  Route10 0.254: v39.37,1.27 v41.91,1.27
  Route11 0.254: v41.91,1.27 v44.45,1.27
  Route12 0.254: v44.45,1.27 v46.99,1.27
  Route13 0.254: v46.99,1.27 v49.53,1.27
  Route14 0.254: v49.53,1.27 v52.07,1.27
  Route15 0.254: v52.07,1.27 v54.61,1.27
  Bottom 0.254: v54.61,1.27 57.15,1.27
S$25  (via drill 1.27 pad 2.54)
  other vias: 52.7,43.81
S$26  (via drill 1.27 pad 2.54)
  other vias: 55.88,43.81
S$27  (via drill 1.27 pad 2.54)
  other vias: 59.05,43.81
TEST
  pour Top (isolate 0.305): 43.81,23.5 43.81,20.95 46.35,20.95 46.35,23.5
TEST1
  pour Route2 (isolate 0.305): 47.62,23.5 47.62,20.95 50.16,20.95 50.16,23.5
TEST2
  pour Route3 (isolate 0.305): 51.44,23.5 51.44,20.95 53.98,20.95 53.98,23.5
TEST3
  pour Route4 (isolate 0.305): 55.24,23.5 55.24,20.95 57.78,20.95 57.78,23.5
TEST4
  pour Route5 (isolate 0.305): 43.81,19.68 43.81,17.14 46.35,17.14 46.35,19.68
TEST5
  pour Route6 (isolate 0.305): 47.62,19.68 47.62,17.14 50.16,17.14 50.16,19.68
TEST6
  pour Route7 (isolate 0.305): 51.44,19.68 51.44,17.14 53.98,17.14 53.98,19.68
TEST7
  pour Route8 (isolate 0.305): 55.24,19.68 55.24,17.14 57.78,17.14 57.78,19.68
TEST8
  pour Route9 (isolate 0.305): 43.81,15.88 43.81,13.34 46.35,13.34 46.35,15.88
TEST9
  pour Route10 (isolate 0.305): 47.62,15.88 47.62,13.34 50.16,13.34 50.16,15.88
TEST10
  pour Route11 (isolate 0.305): 51.44,15.88 51.44,13.34 53.98,13.34 53.98,15.88
TEST11
  pour Route12 (isolate 0.305): 55.24,15.88 55.24,13.34 57.78,13.34 57.78,15.88
TEST12
  pour Route13 (isolate 0.305): 43.81,12.06 43.81,9.53 46.35,9.53 46.35,12.06
TEST13
  pour Route14 (isolate 0.305): 47.62,12.06 47.62,9.53 50.16,9.53 50.16,12.06
TEST14
  pour Route15 (isolate 0.305): 51.44,12.06 51.44,9.53 53.98,9.53 53.98,12.06
TEST15
  pour Bottom (isolate 0.305): 55.24,12.06 55.24,9.53 57.78,9.53 57.78,12.06
TEST17
  pour Top (isolate 0.305): 43.81,6.35 arc-90 45.72,8.26 55.88,8.26 arc-90 57.78,6.35 arc-90 55.88,4.45 45.72,4.45 arc-90
(copper drawn outside any net)
  shapes: Bottom area x1, Bottom circle x1, Top area x1, Top circle x1

## Text on the board
Top: 1 | 1 | 1 | CURVED / POLY
Route2: 2 | 2 | 2
Route3: 3 | 3 | 3
Route4: 4 | 4 | 4
Route5: 5 | 5 | 5
Route6: 6
Route7: 7 | 7 | 7
Route8: 6 | 8 | 8 | 6 | 8
Route9: 9 | 9 | 9
Route10: 10 | 10 | 10
Route11: 11 | 11 | 11
Route12: 12 | 12 | 12
Route13: 13 | 13 | 13
Route14: 14 | 14 | 14
Route15: 15 | 15 | 15
Bottom: 16 | 16 | 16
tPlace: CURVED / TRACE | TPLACE
bPlace: BPLACE
tNames: TNAMES
bNames: BNAMES
tValues: TVALUES
bValues: BOTTOM | BVALUES
tDocu: TDOC
bDocu: BDOC